# Allegro board XR871ET_REF_Simple_L2_V1_0-20170701.brd
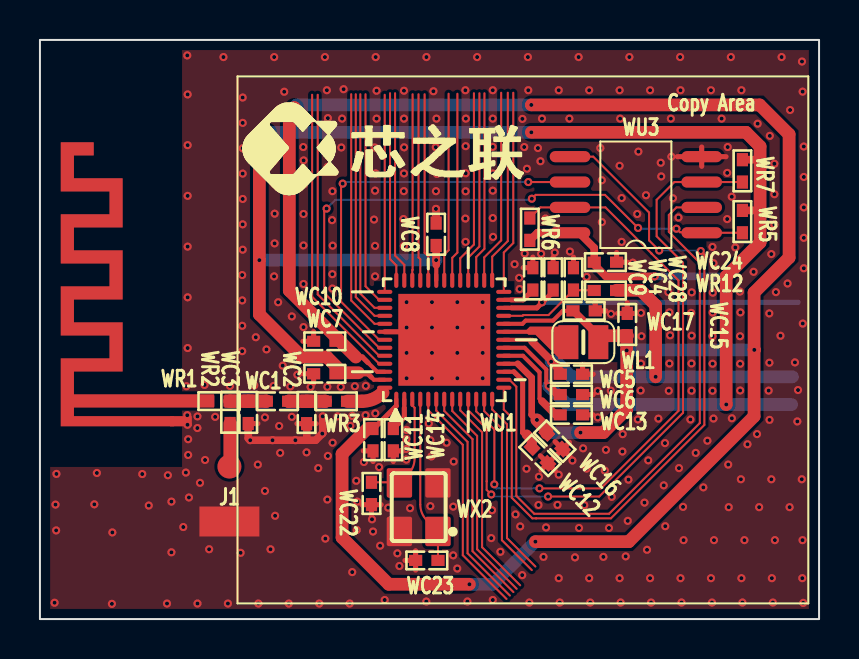
[diagram p0: board, top side]
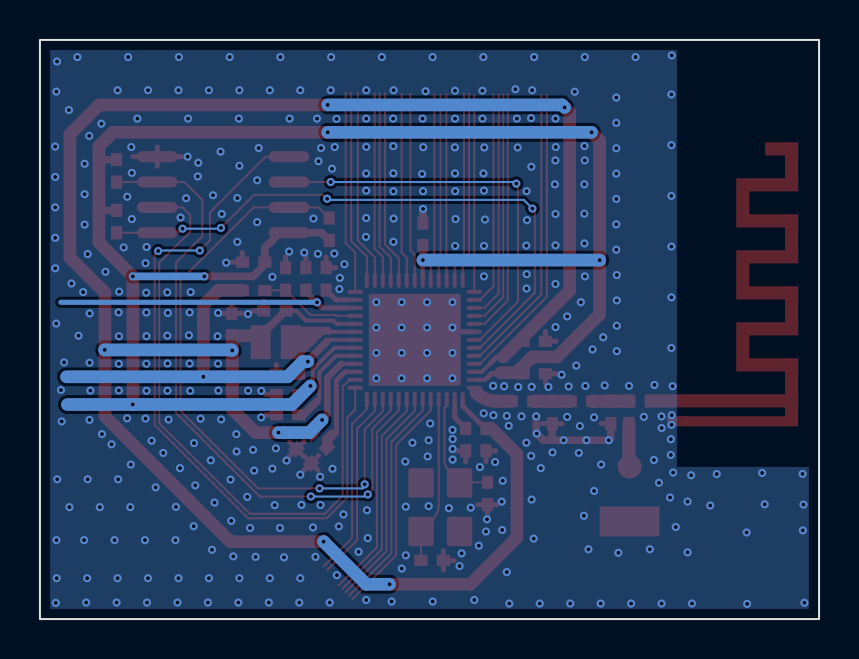
[diagram p1: board, bottom side, seen from below]

Outline 39 x 29 mm; copper layers: TOP, BOTTOM. Coordinates in mm from the lower left corner of the outline.
Outline path: rectangle 0,0 39,29

## Design rules (mm)
net group RF: nets ANT N16735516 N16735520

## Placement (name value [footprint] x y rotation side)
J1  ANT  [ANT2]  9.48 6.14 0 top
NOREF  -  []  0 0 90 top
NOREF#2  -  []  0.51 7.62 90 top
NOREF#3  -  []  4.14 22.07 0 top
NOREF#4  -  []  0 29 0 top
NOREF#5  -  []  1.04 9.65 90 top
NOREF#6  -  []  0 29 0 top
NOREF#7  -  []  0.51 7.62 90 top
WC1  0R  [C0402]  11.89 10.91 180 top
WC2  NC  [C0402]  13.35 10.35 90 top
WC3  NC  [C0402]  10.43 10.35 90 top
WC4  4.7uF  [C0402]  25.69 17.03 270 top
WC5  4.7uF  [C0402]  26.6 12.26 0 top
WC6  4.7uF  [C0402]  26.6 11.24 0 top
WC7  104  [C0402]  14.26 12.28 0 top
WC8  104  [C0402]  19.83 19.27 90 top
WC9  1uF  [C0402]  24.67 17.03 270 top
WC10  104  [C0402]  14.26 13.91 0 top
WC11  104  [C0402]  16.67 8.98 90 top
WC12  4.7uF  [C0402]  25.03 8.19 135 top
WC13  4.7uF  [C0402]  26.6 10.23 180 top
WC14  1uF  [C0402]  17.69 8.98 90 top
WC15  4.7uF  [C0402]  29.4 14.75 90 top
WC16  NC-104  [C0402]  25.77 8.91 135 top
WC17  NC-104  [C0402]  27.24 15.43 180 top
WC22  20pF  [C0402]  16.6 6.29 90 top
WC23  20pF  [C0402]  19.36 2.94 180 top
WC24  104  [C0402]  28.31 17.87 0 top
WC28  100pF  [C0402]  26.71 17.03 270 top
WL1  3.3uH-1.0A DCR<0.2R  [L0806]  27.2 13.86 0 top
WR1  0R  [R0402]  8.96 10.91 180 top
WR2  NC-0R  [R0402]  9.52 10.35 270 top
WR3  0R-NC  [R0402]  14.84 10.91 180 top
WR5  100K-NC  [R0402]  35.16 19.9 90 top
WR6  NC-100K  [R0402]  24.52 19.52 270 top
WR7  NC-100K  [R0402]  35.16 22.44 90 top
WR12  10K  [R0402]  28.31 16.45 0 top
WU1  XR871ET  [QFN52P0_4B6X6_NOSOCKET]  20.24 13.98 0 top
WU3  PN25F16BSSIUG  [SOIC-8]  29.83 21.25 180 top
WX2  24MHz-E3SB24E004304E  [CRY-TSX3225]  18.96 5.6 180 top

## Library data of the parts
J1 = ANT_0
WC1-WC9 WC12-WC15 WC23 WC24 = CAPACITOR
WC10 WC11 WC16 WC17 WC22 WC28 = CAPACITOR_0
WL1 = INDUCTOR
WR1-WR3 WR5-WR7 = R
WR12 = R1 0805
WU1 = XR871ET
WU3 = SPI-NOR-SO8
WX2 = Crystal4Pin_0

## Footprints (pads in the part's own frame, mm; a bottom-side part is the same pattern mirrored in y, then rotated)
ANT2
  round 1.2 smd: 1(0,1.5)
  rect 3x1.5 smd: 2(0,-1.25)
C0402
  rect 0.66x0.56 smd: 1(-0.56,0) 2(0.56,0)
CRY-TSX3225
  custom 1.27x1.47 smd: 1(-0.965,1.215) 2(-0.965,-1.215) 3(0.965,-1.215) 4(0.965,1.215)
L0806
  rect 1x1.7 smd: 1(0.75,0) 2(-0.75,0)
QFN52P0_4B6X6_NOSOCKET
  oval 0.203x0.762 smd: 1(-2.4,-2.981) 2(-2,-2.981) 3(-1.6,-2.981) 4(-1.2,-2.981) 5(-0.8,-2.981) 6(-0.4,-2.981) 7(0,-2.981) 8(0.4,-2.981) 9(0.8,-2.981) 10(1.2,-2.981) 11(1.6,-2.981) 12(2,-2.981) 13(2.4,-2.981) 27(2.4,2.981) 28(2,2.981) 29(1.6,2.981) 30(1.2,2.981) 31(0.8,2.981) 32(0.4,2.981) 33(0,2.981) 34(-0.4,2.981) 35(-0.8,2.981) 36(-1.2,2.981) 37(-1.6,2.981) 38(-2,2.981) 39(-2.4,2.981)
  oval 0.762x0.203 smd: 14(2.981,-2.4) 15(2.981,-2) 16(2.981,-1.6) 17(2.981,-1.2) 18(2.981,-0.8) 19(2.981,-0.4) 20(2.981,0) 21(2.981,0.4) 22(2.981,0.8) 23(2.981,1.2) 24(2.981,1.6) 25(2.981,2) 26(2.981,2.4) 40(-2.981,2.4) 41(-2.981,2) 42(-2.981,1.6) 43(-2.981,1.2) 44(-2.981,0.8) 45(-2.981,0.4) 46(-2.981,0) 47(-2.981,-0.4) 48(-2.981,-0.8) 49(-2.981,-1.2) 50(-2.981,-1.6) 51(-2.981,-2) 52(-2.981,-2.4)
  rect 4.597x4.597 smd: 53(0,0)
R0402
  rect 0.66x0.56 smd: 1(-0.56,0) 2(0.56,0)
SOIC-8
  oval 2.032x0.559 smd: 1(-3.296,1.905) 2(-3.296,0.635) 3(-3.296,-0.635) 4(-3.296,-1.905) 5(3.296,-1.905) 6(3.296,-0.635) 7(3.296,0.635) 8(3.296,1.905)

## Nets
GND: J1.2 WC2.1 WC3.1 WC4.1 WC5.2 WC6.2 WC7.1 WC8.2 WC9.1 WC10.1 WC11.1 WC12.1 WC13.1 WC14.1 WC15.2 WC16.1 WC17.1 WC22.1 WC23.2 WC24.2 WC28.1 WU1.45(TEST) WU1.53(EPAD) WU3.4(VSS) WX2.2 WX2.4(5)
VCC-BAT: WC5.1 WR12.2 WU1.20(VCC)
VDD25-EF: WC4.2 WU1.24(VDD25_EF)
VDD-3V3: WC6.1 WC7.2 WC8.1 WC24.1 WR5.2 WR6.2 WR7.2 WU1.19(VDD_3V3) WU1.34(VDD_IO) WU1.51(VDD33_PA) WU3.8(VCC)
ANT: WC1.1 WC2.2 WR3.2
CHIP-PWD: WC28.2 WR12.1 WU1.23(CHIP_PWD)
HXTAL1: WC23.1 WU1.4(HXTAL1) WX2.1
HXTAL2: WC22.2 WU1.3(HXTAL2) WX2.3
PA0: WU1.5(PA0/SPI1_MOSI/SD_CMD/UART0_TX/C)
PA1: WU1.6(PA1/SPI1_MISO/SD_DATA0/UART0_RX)
PA2: WU1.13(PA2/SPI1_CLK/SD_CLK/TWI1_SCL/CS)
PA3: WU1.12(PA3/SPI1_CS0/SD_DATA1/TWI1_SDA/)
PA4: WU1.35(PA4/WUPIO0/UART1_CTS/SD_DATA2/T)
PA5: WU1.36(PA5/WUPIO1/UART1_RTS/SD_DATA3/T)
PA6: WU1.37(PA6/WUPIO2/UART1_TX/SPI1_CS1/TW)
PA7: WU1.38(PA7/WUPIO3/UART1_RX/SPI1_CS2/TW)
PA8: WU1.26(PA8/ADC_CH0/PWM0/TWI1_SCL/CSI_P)
PA9: WU1.27(PA9/ADC_CH1/PWM1/TWI1_SDA/CSI_M)
PA10: WU1.28(PA10/ADC_CH2/PWM2/DMIC_CLK/CSI_)
PA11: WU1.29(PA11/ADC_CH3/PWM3/DMIC_DATA/CSI)
PA12: WU1.30(PA12/ADC_CH4/PWM4/I2S_MCLK/IR_T)
PA13: WU1.31(PA13/ADC_CH5/PWM5/I2S_BCLK/32KO)
PA14: WU1.32(PA14/ADC_CH6/PWM6/I2S_DI/IR_RX/)
PA15: WU1.33(PA15/ADC_CH7/PWM7/I2S_DO/UART1_)
PA16: WU1.9(PA16/IR_TX/IR_RX/I2S_LRCLK/UART)
PA17: WU1.39(PA17/WUPIO4/TWI0_SCL/IR_RX/TWI1)
PA18: WU1.40(PA18/WUPIO5/TWI0_SDA/IR_TX/TWI1)
PA19: WU1.41(PA19/WUPIO6/NUART_CTS/NSWD_TMS/)
PA20: WU1.42(PA20/WUPIO7/NUART_RTS/NSWD_TCK/)
PA21: WU1.43(PA21/WUPIO8/NUART_TX/DMIC_CLK/P)
PA22: WU1.44(PA22/WUPIO9/NUART_RX/DMIC_DATA/)
PB13: WU1.7(PB13)
PB15: WU1.8(PB15)
PCBANT: WR1.2
SPI0-CLK: WU1.46(PB7/SPI0_CLK/SD_CLK/FLASH_CLK/E) WU3.6(CLK)
SPI0-CS: WR5.1 WU1.47(PB6/SPI0_CS0/FLASH_CS/EINTB6) WU3.1(CS#)
SPI0-HOLD: WR6.1 WU1.11(PB3/SWD_TCK/JTAG_TDI/PWM7/FLASH) WU3.7(HOLD#)
SPI0-MISO: WU1.15(PB5/SPI0_MISO/SD_DATA0/FLASH_MI) WU3.2(MISO)
SPI0-MOSI: WU1.14(PB4/SPI0_MOSI/SD_CMD/FLASH_MOSI) WU3.5(MOSI)
SPI0-WP: WR7.1 WU1.10(PB2/SWD_TMS/JTAG_TDO/PWM6/FLASH) WU3.3(WP#)
UART0-RX: WU1.48(PB1/UART0_RX/JTAG_TCK/PWM5/SWD_)
UART0-TX: WU1.49(PB0/UART0_TX/JTAG_TMS/PWM4/SWD_)
N16732104: WC10.2 WC11.2 WC15.1 WC16.2 WC17.2 WL1.1 WU1.1(VDD14_RX) WU1.17(VDD14_DIG) WU1.22(VDD_SENSE) WU1.50(VDD14_TX)
N16732180: WR3.1 WU1.52(ANT)
N16732230: WL1.2 WU1.21(VDD_VLX)
N16732278: WC14.2 WU1.2(VDD12_CLK)
N16732320: WC13.2 WU1.18(VDD12_DIG)
N16732574: WC12.2 WU1.16(VDD12_SRAM)
N16732608: WC9.2 WU1.25(VDD_RTC)
N16735516: J1.1 WR2.2
N16735520: WC1.2 WC3.2 WR1.1 WR2.1

## Via types
v1: diameter 0.406, hole 0.203, TOP to BOTTOM, 424 vias

## Routing (per net, layer and track width the routed paths; a pad name or vN(x,y) marks a point on that pad's centre or on a via; arc(x,y) is an arc through that point)
GND: length 34.5
  TOP w0.254: 17.69,7.89 WC14.1 18.17,8.42 ; WC6.2 27.7,11.24 ; WC15.2 29.88,15.31 ; WC15.2 28.91,15.31 ; WC15.2 29.4,15.84 ; 13.7,11.8 WC7.1 13.17,12.28 ; 25.78,8.89 WC16.1 ; WC16.1 26.54,8.13 ; WC16.1 25.82,8.17 ; WC16.1 26.5,8.85 ; 16.11,5.73 WC22.1 ; WC22.1 16.6,5.2 ; WC22.1 17.08,5.73 ; 13.7,14.39 WC10.1 13.17,13.91 ; WC3.1 10.91,9.79 ; 24.19,17.59 WC9.1 24.67,18.13 ; 28.33,15.43 WC17.1 27.8,15.92 ; 12.86,9.79 WC2.1 ; WC2.1 13.83,9.79 ; WC2.1 13.35,9.25 ; WC13.1 27.7,10.23 ; 33.13,22.67 WU3.4 ; WU3.4 34.35,23.15 ; WU3.4 31.91,23.15 ; WU3.4 33.13,23.64 ; 28.87,18.36 WC24.2 29.4,17.87 ; WU1.53 19.84,14.38 WU1.45 ; 27.16,12.74 WC5.2 27.7,12.26 ; 18.8,2.45 WC23.2 ; WC23.2 18.8,3.42 ; WC23.2 18.27,2.94 ; 25.08,7.46 WC12.1 ; WC12.1 25.8,7.42 ; WC12.1 25.05,8.18 ; WC12.1 25.77,8.14 ; WC28.1 26.71,18.13 ; 16.19,8.42 WC11.1 16.67,7.89 ; WC4.1 25.69,18.13
  TOP w0.381: 13.27,8.96 v1(12.79,8.96) v1(11.64,8.96) v1(10.53,8.96) 10.43,9.06 WC3.1 ; 13.27,8.96 13.8,8.96 v1(14.13,9.29) 14.16,9.31 v1(14.16,10.15) ; 13.27,8.96 13.36,9.05 WC2.1 ; WC8.2 19.83,20.53 v1(19.82,20.54) 19.83,20.55
  vias: v1(0.73,0.82) v1(0.82,7.27) v1(0.78,5.73) v1(0.81,4.44) v1(2.72,5.75) v1(2.85,7.32) v1(3.62,4.34) v1(3.6,0.76) v1(5.12,7.26) v1(5.45,5.69) v1(6.36,0.78) v1(6.4,7.2) v1(6.58,5.88) v1(6.58,3.34) v1(7.17,4.61) v1(7.33,11.66) v1(7.3,7.34) v1(7.37,28.23) v1(7.39,26.27) v1(7.39,23.73) v1(7.39,21.19) v1(7.39,18.65) v1(7.39,16.11) v1(7.39,13.57) v1(7.37,10.21) v1(7.39,9.73) v1(7.42,9.01) v1(7.42,8.22) v1(7.46,6.09) v1(7.88,10.15) v1(7.88,9.57) v1(7.88,0.78) v1(8.01,6.82) v1(8.24,11.72) v1(8.27,7.97) v1(8.47,3.5) v1(8.77,10.12) v1(9.18,28.14) v1(9.41,0.78) v1(9.51,11.67) v1(10.04,3.32) v1(10.15,26.12) v1(10.15,24.85) v1(10.15,23.58) v1(10.15,22.31) v1(10.15,21.04) v1(10.15,19.77) v1(10.15,18.5) v1(10.12,17.23) v1(10.12,15.96) v1(10.12,14.69) v1(10.12,13.42) v1(10.73,11.7) v1(10.81,14.11) v1(10.91,7.74) v1(10.93,0.78) v1(11.26,10.1) v1(11.26,6.42) v1(11.34,13.5) v1(11.54,3.5) v1(11.72,28.14) v1(11.74,23.69) v1(11.72,22.97) v1(11.75,21.77) v1(11.75,20.3) v1(11.74,18.81) v1(11.72,17.16) v1(11.69,11.67) v1(11.77,5.17) v1(11.92,15.86) v1(11.97,9.67) v1(12.02,8.32) v1(12.15,12.69) v1(12.23,26.41) v1(12.46,0.78) v1(12.53,11.65) v1(12.61,15.15) v1(12.61,10.12) v1(12.89,12.23) v1(13.19,25.06) v1(13.18,23.64) v1(13.2,22.97) v1(13.22,21.77) v1(13.19,20.28) v1(13.19,18.71) v1(13.19,16.78) v1(13.19,14.62) v1(13.35,8.35) v1(13.55,11.62) v1(13.93,7.56) v1(13.98,0.78) v1(14.26,28.14) v1(14.36,26.48) v1(14.28,4.03) v1(14.41,25.09) v1(14.4,22.65) v1(14.39,11.63) v1(14.41,8.17) v1(14.39,5.98) v1(14.64,21.43) v1(14.62,19.98) v1(14.65,18.7) v1(14.64,17.27) v1(14.64,16.55) v1(14.65,8.83) v1(14.89,10.15) v1(15.06,11.62) v1(15.12,25.06) v1(15.09,23.61) v1(15.2,26.53) v1(15.53,9.68) v1(15.5,0.78) v1(15.63,10.18) v1(15.63,2.35) v1(15.76,11.66) v1(15.83,6.92) v1(15.86,4.46) v1(15.89,5.88) v1(16.22,7.86) v1(16.31,11.68) v1(16.3,10.21) v1(16.62,4.99) v1(16.76,23.61) v1(16.72,20.01) v1(16.67,4.38) v1(16.8,28.14) v1(16.85,26.46) v1(16.85,25.06) v1(16.8,22.32) v1(16.77,21.45) v1(16.77,18.69) v1(16.77,17.16) v1(16.79,10.3) v1(16.98,7.61) v1(17.03,3.67) v1(17.26,0.96) v1(17.43,5.58) v1(17.89,3.29) v1(17.99,2.66) v1(18.22,26.46) v1(18.22,25.06) v1(18.23,23.62) v1(18.22,22.32) v1(18.21,21.43) v1(18.2,20.03) v1(18.22,18.68) v1(18.35,15.87) v1(18.35,14.6) v1(18.35,13.33) v1(18.35,12.06) v1(18.35,9.47) v1(18.34,9.01) v1(18.34,8.52) v1(18.34,7.99) v1(18.53,5.55) v1(19.34,28.14) v1(19.34,0.88) v1(19.47,9.79) v1(19.54,8.96) v1(19.54,5.65) v1(19.62,15.87) v1(19.62,14.6) v1(19.62,13.33) v1(19.62,12.06) v1(19.59,8.14) v1(19.7,26.43) v1(19.85,25.06) v1(19.81,23.63) v1(19.82,21.43) v1(19.87,22.29) v1(20.36,8.83) v1(20.71,7.89) v1(20.69,5.63) v1(20.69,3.19) v1(20.89,15.87) v1(20.89,14.6) v1(20.89,13.33) v1(20.89,12.06) v1(20.89,2.53) v1(21.3,26.48) v1(21.32,25.06) v1(21.31,23.68) v1(21.31,22.32) v1(21.31,21.42) v1(21.3,20.06) v1(21.31,18.89) v1(21.4,0.88) v1(21.88,28.14) v1(22.16,15.87) v1(22.16,14.6) v1(22.16,13.33) v1(22.16,12.06) v1(22.63,5.45) v1(22.59,4.05) v1(22.67,26.48) v1(22.67,25.06) v1(22.66,23.64) v1(22.67,22.31) v1(22.67,21.45) v1(22.67,20.08) v1(22.68,19.14) v1(22.67,0.96) v1(23.05,3.37) v1(23.76,17.77) v1(23.81,5.24) v1(23.99,17.08) v1(24.01,16.53) v1(24.04,4.64) v1(24.15,25.05) v1(24.14,2.2) v1(24.24,23.64) v1(24.27,18.3) v1(24.36,7.53) v1(24.42,28.14) v1(24.44,26.48) v1(24.38,22.55) v1(24.5,0.83) v1(24.93,23.59) v1(24.96,5.71) v1(25.05,22.93) v1(24.98,7.13) v1(25.13,25.06) v1(25.09,18.29) v1(25.21,3.11) v1(25.31,20.06) v1(25.33,4.59) v1(25.77,18.35) v1(25.91,5.72) v1(25.97,26.48) v1(25.97,7.23) v1(25.97,2.05) v1(26.02,0.83) v1(26.5,25.06) v1(26.53,18.4) v1(26.65,7.94) v1(26.78,3.09) v1(26.96,28.14) v1(26.98,4.56) v1(27.19,8.55) v1(27.25,5.7) v1(27.37,17.13) v1(27.37,7.53) v1(27.49,26.48) v1(27.49,2.05) v1(27.54,0.83) v1(27.92,11.42) v1(27.92,10.1) v1(28.05,23.59) v1(28.13,21.97) v1(28.13,19.88) v1(28.2,3.11) v1(28.33,8.47) v1(28.28,7.43) v1(28.48,4.56) v1(28.59,15.28) v1(28.58,11.44) v1(28.62,6.12) v1(29.02,26.48) v1(29.04,25.06) v1(29.02,22.7) v1(29.02,2.05) v1(29.12,21.08) v1(29.12,18.89) v1(29.16,8.39) v1(29.07,0.83) v1(29.17,9.26) v1(29.32,3.14) v1(29.46,6.98) v1(29.42,4.92) v1(29.5,28.14) v1(29.68,17.85) v1(29.96,23.41) v1(29.9,20.28) v1(29.93,10) v1(30.08,15.33) v1(30.11,14.16) v1(30.08,12.79) v1(30.07,11.44) v1(30.26,5.83) v1(30.34,21.22) v1(30.45,7.95) v1(30.39,3.47) v1(30.54,26.48) v1(30.54,2.05) v1(30.59,0.83) v1(30.96,10.04) v1(31.07,22.85) v1(31.1,22.16) v1(31.23,6.7) v1(31.29,8.81) v1(31.3,4.65) v1(31.46,16.37) v1(31.51,15.36) v1(31.54,14.21) v1(31.51,12.8) v1(31.48,11.43) v1(31.58,25.06) v1(31.61,23.15) v1(31.68,21.07) v1(31.96,20.11) v1(32.04,28.14) v1(31.99,7.56) v1(32.06,26.48) v1(32.06,2.05) v1(32.12,0.83) v1(32.19,5.62) v1(32.22,3.95) v1(32.56,9.99) v1(32.63,16.36) v1(32.6,15.33) v1(32.62,14.19) v1(32.61,12.8) v1(32.62,11.44) v1(32.83,8.32) v1(33.21,6.59) v1(33.41,8.93) v1(33.59,26.48) v1(33.59,2.05) v1(33.64,0.83) v1(33.67,18.63) v1(33.72,17.82) v1(33.68,16.34) v1(33.67,15.35) v1(33.67,14.17) v1(33.67,12.79) v1(33.67,11.43) v1(33.72,10.04) v1(33.74,3.95) v1(34.12,25.06) v1(34.43,23.64) v1(34.4,22.34) v1(34.4,20.03) v1(34.45,7.74) v1(34.48,5.6) v1(34.58,28.14) v1(34.63,21.15) v1(34.64,10.05) v1(34.81,18.61) v1(35.04,16.4) v1(35.06,15.36) v1(35.04,14.16) v1(35.05,12.78) v1(35.05,11.45) v1(35.11,26.48) v1(35.09,7) v1(35.11,2.05) v1(35.16,0.83) v1(35.27,3.95) v1(35.42,8.75) v1(35.72,17.39) v1(35.93,24.81) v1(35.9,9.26) v1(36,5.6) v1(36.54,24.2) v1(36.51,15.31) v1(36.52,12.84) v1(36.48,11.44) v1(36.52,9.97) v1(36.61,18.28) v1(36.61,7) v1(36.64,2.05) v1(36.69,0.83) v1(36.76,22.8) v1(36.76,21.28) v1(36.76,19.75) v1(36.84,16.37) v1(36.79,3.95) v1(37.12,28.14) v1(37.07,14.19) v1(37.42,16.8) v1(37.55,25.49) v1(37.53,5.6) v1(37.79,12.85) v1(37.95,11.47) v1(37.91,9.9) v1(38.15,27.92) v1(38.14,7) v1(38.16,2.05) v1(38.18,26.41) v1(38.24,23.66) v1(38.24,22.14) v1(38.24,20.61) v1(38.24,19.09) v1(38.24,17.57) v1(38.19,14.8) v1(38.17,3.95) v1(38.21,0.81)
VCC-BAT: length 21.9
  TOP w0.102: WR12.2 28.87,16.47
  TOP w0.203: 24.64,13.9 24.55,13.98 WU1.20
  TOP w0.381: WC5.1 26.04,12.44 v1(25.59,12.89) 25.59,12.94 24.64,13.9
  TOP w0.635: v1(30.82,12.13) 30.82,15.71 30.07,16.47 28.87,16.47
  BOTTOM w0.635: 37.67,12.13 v1(30.82,12.13) 26.6,12.13 25.84,12.89 v1(25.59,12.89)
VDD25-EF: length 15.7
  TOP w0.203: 23.61,15.58 WU1.24
  TOP w0.254: WC4.2 25.69,16.39 25.16,15.86 v1(25.13,15.86) 25.13,15.84 24.88,15.58 23.61,15.58
  BOTTOM w0.254: v1(25.13,15.86) 37.95,15.86
VDD-3V3: length 96.4
  TOP w0.127: 15.15,12.33 15.1,12.28 WC7.2
  TOP w0.203: WU1.34 19.84,17.74 ; v1(25.46,11.67) 25.46,11.7 25.35,11.81 25.35,12.5 24.26,13.58 WU1.19 ; WU1.51 16.71,11.98 16.58,12.12
  TOP w0.254: 16.58,12.12 16.42,12.28 15.99,12.28 15.94,12.33
  TOP w0.381: v1(25.46,11.67) 25.9,11.24 WC6.1 ; WR7.2 36,23 36.05,22.95 ; WR5.2 36.02,20.46 36.05,20.49 ; WC8.1 v1(19.83,17.98) 19.84,17.97 19.84,17.74 ; v1(30.77,17.16) 28.33,17.16 27.75,17.75 WC24.1 27.75,18.58 26.98,19.34 WU3.8 24.9,19.34 WR6.2
  TOP w0.635: 15.94,12.33 15.15,12.33 14.36,13.12 13.12,13.12 10.98,15.25 v1(10.98,17.97) 10.98,23.97 v1(11.39,24.37) ; v1(34.35,10.75) 34.35,10.75 v1(34.35,17.16) 36.05,18.86 36.05,23.67 35.34,24.37 v1(24.6,24.37)
  BOTTOM w0.381: v1(30.77,17.16) v1(34.35,17.16)
  BOTTOM w0.635: v1(10.98,17.97) 10.99,17.98 v1(19.83,17.98) ; v1(11.39,24.37) v1(24.6,24.37) ; 37.63,10.74 34.38,10.74 34.37,10.75 v1(34.35,10.75) 26.39,10.75 v1(25.46,11.67)
ANT: length 1.8
  TOP w0.66: WC1.1 12.45,10.91 WC2.2 WR3.2
CHIP-PWD: length 5.1
  TOP w0.102: WU1.23 24.16,15.18 24.2,15.22 25.46,15.22 WC28.2 26.71,16.47 27.75,16.47 WR12.1
HXTAL1: length 8.4
  TOP w0.102: WU1.4 19.04,5.73 arc(19.12,5.31) 19.36,4.95 WX2.1 19.92,2.94 WC23.1
HXTAL2: length 5.9
  TOP w0.102: WC22.2 17.96,6.85 WX2.3 18.43,7.25 arc(18.67,7.62) 18.76,8.04 18.76,10.58 18.64,10.7 WU1.3
PA0: length 11.6
  TOP w0.102: WU1.5 19.44,10.45 21.17,8.73 21.17,3.2 23.35,1.01
PA1: length 11.4
  TOP w0.102: 23.52,1.18 21.41,3.3 21.41,8.87 19.84,10.44 WU1.6
PA2: length 9.3
  TOP w0.102: 24.8,2.63 23.38,4.05 23.38,9.76 22.64,10.5 WU1.13
PA3: length 9.5
  TOP w0.102: 24.62,2.45 23.12,3.95 23.12,9.53 22.24,10.41 WU1.12
PA4: length 9.4
  TOP w0.102: 19.26,26.28 19.26,18.34 19.44,18.16 WU1.35
PA5: length 9.4
  TOP w0.102: WU1.36 19.04,18.02 18.95,18.11 18.95,26.28
PA6: length 9.3
  TOP w0.102: 18.65,26.28 18.65,17.49 18.64,17.47 WU1.37
PA7: length 9.6
  TOP w0.102: WU1.38 18.24,17.74 17.78,18.2 17.78,26.33
PA8: length 10.2
  TOP w0.102: WU1.26 23.22,18.35 23.69,18.83 23.69,26.36
PA9: length 9.7
  TOP w0.102: WU1.27 22.64,18.15 23.42,18.93 23.42,26.36
PA10: length 9.7
  TOP w0.102: WU1.28 22.24,18.11 23.09,18.96 23.09,26.36
PA11: length 9.5
  TOP w0.102: WU1.29 21.84,18.13 22.25,18.54 22.25,26.33
PA12: length 9.6
  TOP w0.102: 22,26.33 22,18.66 21.44,18.1 WU1.30
PA13: length 9.6
  TOP w0.102: WU1.31 21.04,18.07 21.72,18.75 21.72,26.33
PA14: length 9.4
  TOP w0.102: 20.9,26.3 20.9,18.35 20.64,18.09 WU1.32
PA15: length 9.4
  TOP w0.102: WU1.33 20.24,18.25 20.46,18.47 20.46,26.3
PA16: length 10.6
  TOP w0.102: WU1.9 21.04,10.45 22.13,9.36 22.13,3.6 24.04,1.69
PA17: length 9.5
  TOP w0.102: WU1.39 17.84,17.71 17.52,18.03 17.52,26.33
PA18: length 9.9
  TOP w0.102: WU1.40 17.26,26.25
PA19: length 10.9
  TOP w0.102: 16.3,26.28 16.3,16.67 16.98,15.98 WU1.41
PA20: length 11.5
  TOP w0.102: WU1.42 16.75,15.58 16.04,16.3 16.04,26.28
PA21: length 12
  TOP w0.102: 15.81,26.28 15.81,16.13 16.75,15.18 WU1.43
PA22: length 12.5
  TOP w0.102: WU1.44 16.75,14.78 15.58,15.95 15.58,26.28
PB13: length 11.1
  TOP w0.102: WU1.7 20.24,10.42 21.65,9.01 21.65,3.4 23.7,1.35
PB15: length 10.8
  TOP w0.102: WU1.8 20.64,10.42 21.88,9.17 21.88,3.49 23.86,1.52
SPI0-CLK: length 20.3
  TOP w0.102: v1(15.15,21.81) 15.07,21.72 15.07,15.89 16.98,13.98 WU1.46 ; WU3.6 v1(24.44,21.88)
  BOTTOM w0.102: v1(15.15,21.81) 15.23,21.88 v1(24.44,21.88)
SPI0-CS: length 30.3
  TOP w0.102: v1(24.62,21.05) 24.82,21.24 28.28,21.24 v1(29.94,19.59) ; WR5.1 35.14,19.34 WU3.1 33.1,19.37 32.04,19.37 v1(31.86,19.55) ; WU1.47 16.98,13.58 14.23,16.33 14.23,20.43 14.35,20.55 v1(14.35,20.56)
  BOTTOM w0.102: v1(24.62,21.05) 24.56,20.99 14.78,20.99 v1(14.35,20.56) ; v1(29.94,19.59) 29.98,19.55 v1(31.86,19.55)
SPI0-HOLD: length 31.3
  TOP w0.102: v1(25,6.54) 28.08,6.54 31.96,10.43 31.96,16.96 30.85,18.07 30.84,18.07 30.62,18.3 30.62,18.3 28.31,20.61 WU3.7 25.05,20.61 WR6.1 ; v1(22.74,6.75) 22.75,6.75 22.75,9.49 21.84,10.4 WU1.11
  BOTTOM w0.102: v1(22.74,6.75) 22.74,6.64 22.84,6.54 v1(25,6.54)
SPI0-MISO: length 30.5
  TOP w0.102: WU1.15 23.5,11.98 23.85,11.64 23.85,6.17 24.74,5.27 28.49,5.27 33.03,9.81 33.03,17.84 31.48,19.39 31.48,20.23 31.86,20.61 WU3.2
SPI0-MOSI: length 35.8
  TOP w0.102: WU3.5 27.7,23.15 30.49,20.36 30.49,18.96 v1(31,18.46) ; v1(33.08,18.43) 33.26,18.25 33.26,9.72 28.58,5.04 24.84,5.04 24.65,5.04 23.62,6.07 23.62,10.09 23.22,10.49 WU1.14
  BOTTOM w0.102: v1(33.08,18.43) 33.06,18.46 v1(31,18.46)
SPI0-WP: length 32.5
  TOP w0.102: WU1.10 21.44,10.45 22.36,9.53 22.36,6.9 22.36,6.9 22.36,6.47 v1(22.59,6.24) ; WR7.1 35.09,21.88 WU3.3 31.76,21.88 30.87,21 30.87,19.17 32.19,17.85 32.19,10.33 28,6.14 v1(25.44,6.14)
  BOTTOM w0.102: v1(25.44,6.14) 22.69,6.14 v1(22.59,6.24)
UART0-RX: length 14.6
  TOP w0.102: 13.9,26.25 13.9,16.26 16.98,13.18 WU1.48
UART0-TX: length 15.1
  TOP w0.102: WU1.49 16.98,12.78 13.62,16.14 13.62,26.25
N16732104: length 117.2
  TOP w0.102: WC10.2 14.85,13.91
  TOP w0.127: 14.86,14.07 14.72,13.93 14.85,13.91
  TOP w0.203: WU1.22 24.15,14.78 24.31,14.94 25.68,14.94 26.17,15.43 WC17.2 ; 16.42,12.84 16.88,12.38 WU1.50 ; WU1.17 23.92,12.78 ; 17.84,10.67 WU1.1
  TOP w0.254: 17.84,10.67 16.71,9.54 WC11.2 ; 16.42,12.84 16.14,13.12 15.81,13.12
  TOP w0.33: v1(24.88,9.97) 24.62,10.23 24.62,12.09 23.92,12.78
  TOP w0.381: WC11.2 16.4,9.54 ; WC17.2 26.71,15.43 27.95,14.19 WL1.1
  TOP w0.635: v1(24.88,9.97) 25.37,9.48 WC16.2 ; v1(21.5,1.74) 17.46,1.74 15.12,4.08 15.12,8.27 16.4,9.54 ; v1(35.76,13.48) 35.76,13.48 35.75,13.48 ; 35.75,13.48 35.75,16.35 37.5,18.1 37.5,24.27 36.03,25.75 v1(24.6,25.75) ; 35.75,13.48 35.75,10.15 29.47,3.88 v1(24.8,3.88) ; 15.81,13.12 12.48,16.45 12.48,25.36 v1(12.74,25.62) ; v1(27.06,9.34) 28.2,9.34 29.37,10.51 v1(29.37,13.45) 29.37,14.16 WC15.1 28.27,14.19 WL1.1
  BOTTOM w0.635: v1(24.6,25.75) 12.86,25.75 v1(12.74,25.62) ; v1(35.76,13.48) 35.76,13.48 29.4,13.48 v1(29.37,13.45) ; v1(27.06,9.34) 25.51,9.34 v1(24.88,9.97) ; v1(24.8,3.88) 24.8,3.88 22.67,1.74 v1(21.5,1.74)
N16732180: length 2.2
  TOP w0.102: 17.16,11.34 17.16,11.49 WU1.52
  TOP w0.66: WR3.1 16.12,10.91 arc(16.68,11.02) 17.16,11.34
N16732230: length 1.9
  TOP w0.203: WU1.21 25.08,14.38
N16732278: length 1.7
  TOP w0.203: 18.24,10.57 WU1.2
  TOP w0.254: 18.24,10.57 18.24,10.09 WC14.2
N16732320: length 4.8
  TOP w0.203: WU1.18 24.18,13.18 25.01,12.35 25.01,11.03 25.13,10.91
  TOP w0.381: WC13.2 25.82,10.23 25.13,10.91
N16732574: length 4.8
  TOP w0.102: 24.62,8.58 WC12.2
  TOP w0.203: WU1.16 23.73,12.38
  TOP w0.254: 23.73,12.38 24.16,11.95 24.16,9.34 24.26,9.24 24.37,9.24
  TOP w0.508: 24.62,8.58 24.62,8.98 24.37,9.24
N16732608: length 1.7
  TOP w0.203: 23.58,15.98 WU1.25
  TOP w0.254: WC9.2 24.18,15.98 23.58,15.98
N16735516: length 2.2
  TOP w0.66: WR2.2 9.52,7.67 J1.1
N16735520: length 1.8
  TOP w0.66: WR2.1 9.52,10.91 WC3.2 11.33,10.91 WC1.2

## Copper pours and planes (outline as drawn; the poured copper is in the pictures)
GND on TOP, BOTTOM: 0.51,0.51 0.51,28.49 38.49,28.49 38.49,0.51
PCBANT on TOP (solid shape): 2.69,23.22 1.7,23.22 1.7,22.07 4.14,22.07 4.14,19.61 1.7,19.61 1.7,18.47 4.14,18.47 4.14,16 1.7,16 1.7,14.86 4.14,14.86 4.14,12.4 1.7,12.4 1.7,11.25 8.72,11.25 8.72,10.59 1.7,10.59 1.7,10.16 6.72,10.16 6.72,9.65 1.04,9.65 1.04,13.06 3.48,13.06 3.48,14.2 1.04,14.2 1.04,16.66 3.48,16.66 3.48,17.81 1.04,17.81 1.04,20.27 3.48,20.27 3.48,21.41 1.04,21.41 1.04,23.88 2.69,23.88
N16732230 on TOP (solid shape): 26.88,13.1 26.83,13.05 25.99,13.05 24.8,14.24 24.44,14.24 24.32,14.37 24.32,14.44 24.52,14.65 26.88,14.65

Small or netless copper shapes (teardrops, artwork), in the pictures only: 1 on TOP

## Text on the board
Ref Des/Silkscreen Top: Copy Area
PLACE_BOUND_TOP: FIGURE | SIZE | 8.0 | DRILL CHART: TOP to BOTTOM | ALL UNITS ARE IN MILS | PLATED | QTY | 391
